# Altium PCB 裂缝(应变)计.PcbDoc
Units mm, origin at the board's own origin, x right, y up, seen from the top; angles counter-clockwise.
Board outline 152.4 x 101.6 mm, 2 copper layers (Top Layer, Bottom Layer); 77 components, 65 nets, 268 pads, 0 vias.
Unrouted connection lines stored in the file: 181.
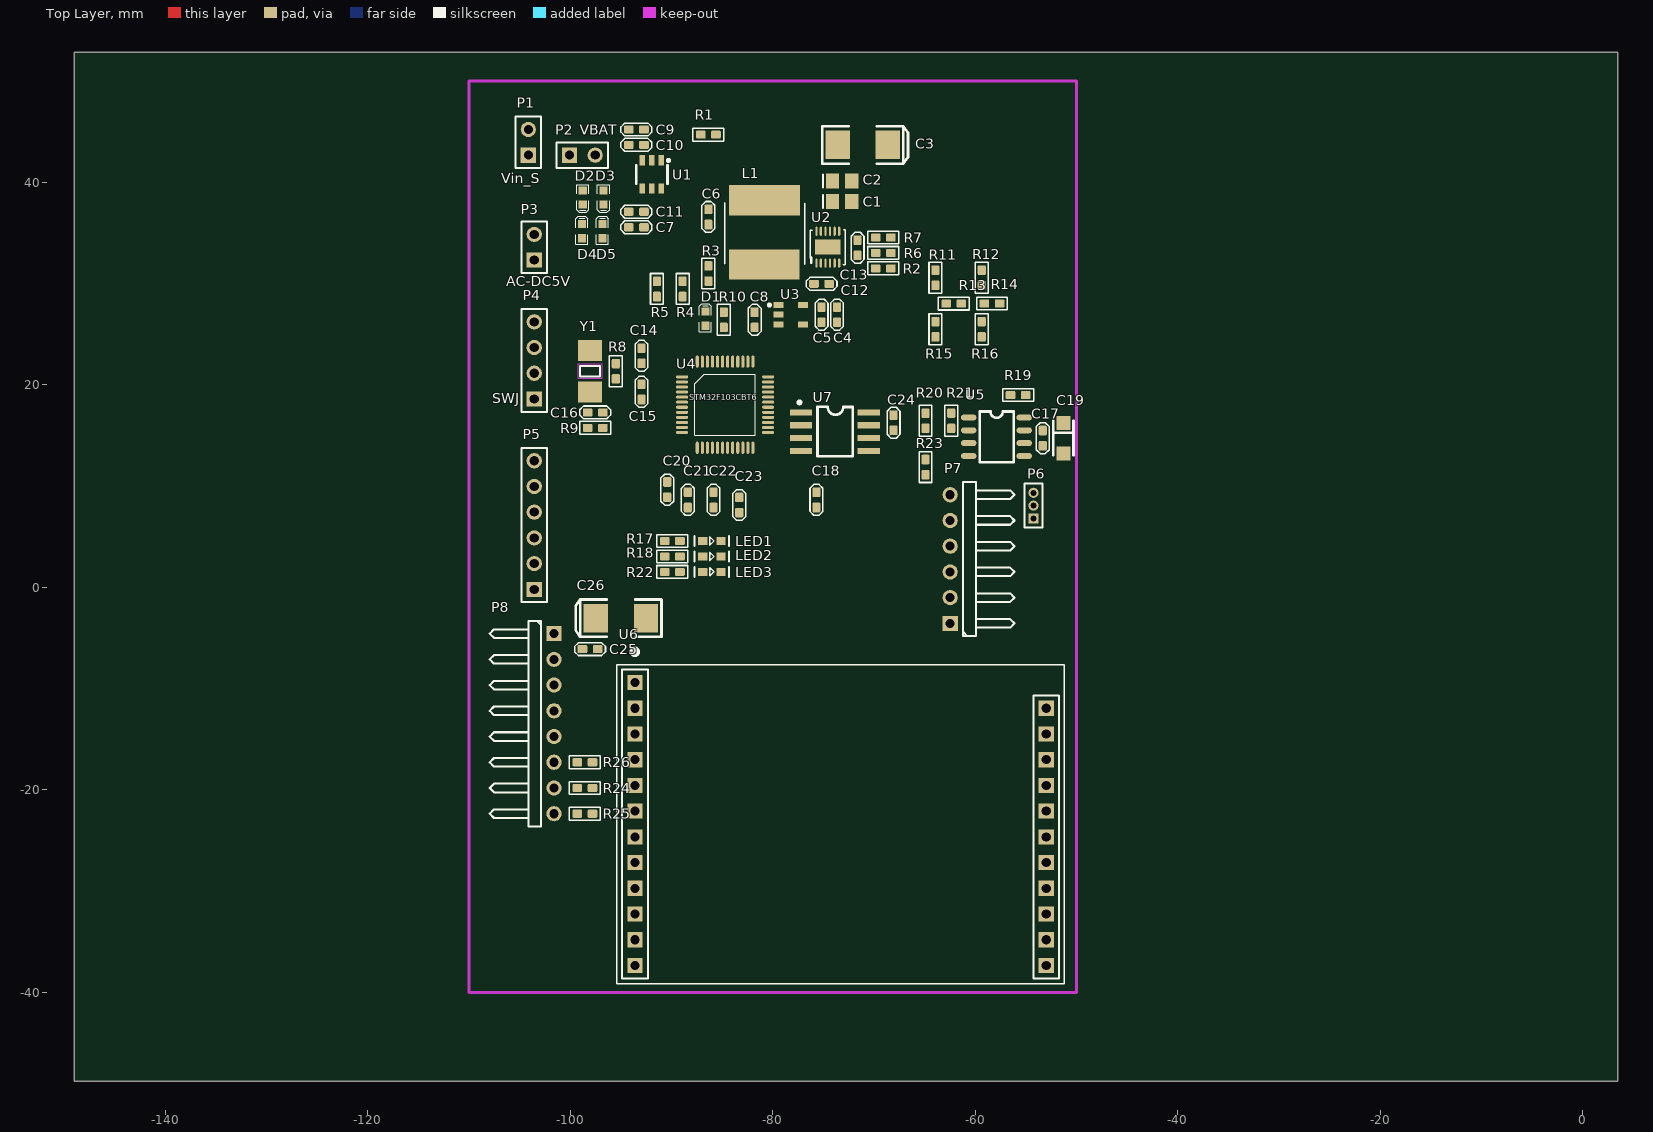
[diagram p0: Top Layer view]
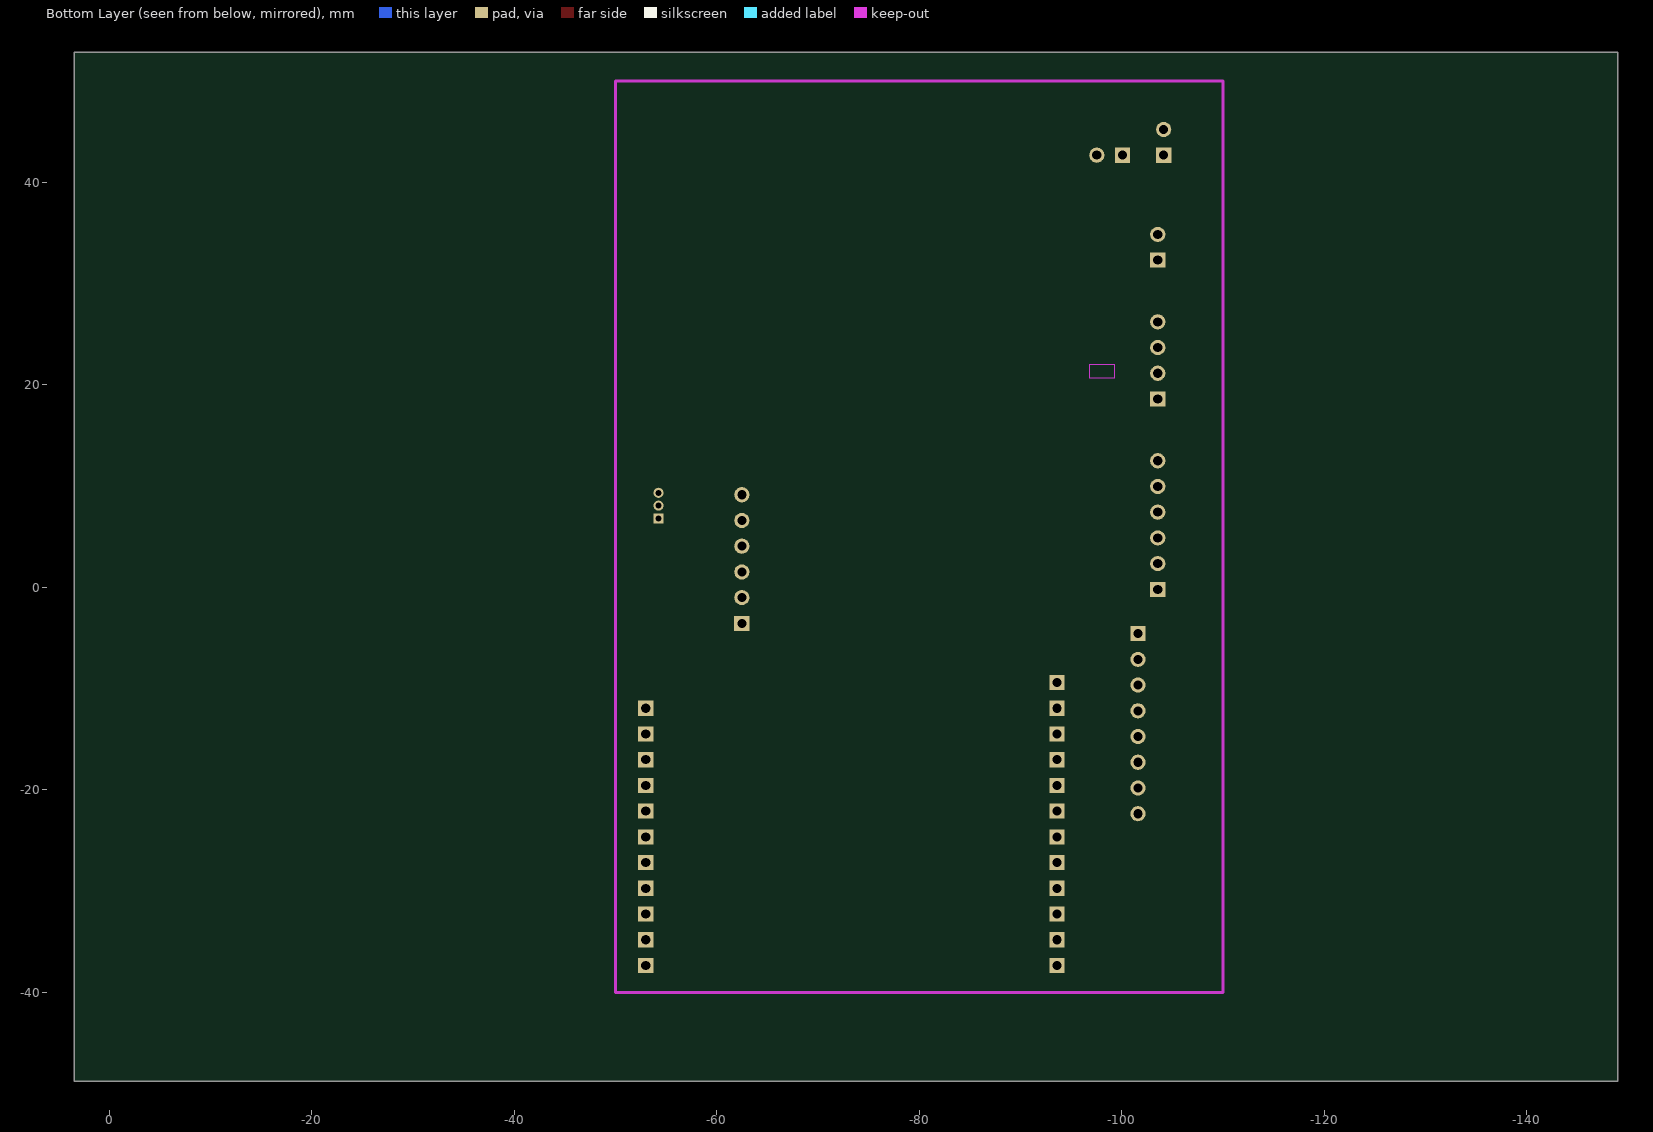
[diagram p1: Bottom Layer view, seen from below]

## Layer stack, top to bottom
Top Layer: signal copper 0.0356
Dielectric: dielectric 0.32, FR-4, Dk 4.8
Bottom Layer: signal copper 0.0356

## Board outline
-148.971,-48.768 3.429,-48.768 3.429,52.832 -148.971,52.832

## Design rules (kind name [scope] priority, off if disabled: settings)
Clearance [All] p1: gap=0.2
ComponentClearance [All] p1: gap=0.254 collisioncheckmode=3 verticalgap=0.1 showdistances=FALSE
MinimumSolderMaskSliver [All] p1: minsoldermaskwidth=0
PolygonConnect [All] p1: connectstyle=Relief reliefconductorwidth=0.254 reliefentries=4 polygonreliefangle="90 Angle"
RoutingVias [All] p1: holewidth=0.711 width=1.27 viastyle="Through Hole" minholewidth=0.711 minwidth=1.27 maxholewidth=0.711 maxwidth=1.27
SilkToSilkClearance [All] p1: silktosilkclearance=0
SilkscreenOverComponentPads [All] p1: minsilkscreentomaskgap=0
SolderMaskExpansion [All] p1: expansion=0.102
TestPointUsage [All] p1: valid=0 allowmultiple=FALSE
Testpoint [All] p1: side=15 testpointundercomponent=TRUE minsize=1.016 maxsize=2.54 preferedsize=1.524 minholesize=0 maxholesize=1.016 preferedholesize=0.813 testpointgrid=0.025 style=1023 order=0123456789
Width [All] p1: maxlimit=0.254 minlimit=0.254 preferedwidth=0.254
20 further rules are at their usual default settings.

## Components (designator, comment, footprint, x,y, rotation, side; value= is the part's Value field where it differs from the comment)
C1 "22uF" C0805 -73.152,38.1 r0 top
C2 "Cap" C0805 -73.152,40.132 r0 top
C3 "220uF/25V" C_6032 -71.12,43.688 r0 top
C4 "106" C0603 -73.66,26.924 r270 top
C5 "104" C0603 -75.184,26.924 r270 top
C6 "Cap" C0603 -86.36,36.576 r90 top
C7 "106" C0603 -93.472,35.56 r0 top
C8 "105" C0603 -81.788,26.416 r270 top
C9 "106" C0603 -93.472,45.212 r0 top
C10 "104" C0603 -93.472,43.688 r180 top
C11 "104" C0603 -93.472,37.084 r180 top
C12 "Cap" C0603 -75.184,29.972 r180 top
C13 "1uF" C0603 -71.628,33.528 r270 top
C14 "22PF" C0603 -92.964,22.86 r90 top
C15 "22PF" C0603 -92.964,19.304 r270 top
C16 "104" C0603 -97.536,17.272 r180 top
C17 "104" C0603 -53.34,14.732 r270 top
C18 "106" C0603 -75.692,8.636 r90 top
C19 "104" 3216 -51.308,14.732 r90 top
C20 "104" C0603 -90.424,9.652 r270 top
C21 "104" C0603 -88.392,8.636 r90 top
C22 "104" C0603 -85.852,8.636 r90 top
C23 "104" C0603 -83.312,8.128 r90 top
C24 "104" C0603 -68.072,16.256 r270 top
C25 "104" C0603 -98.044,-6.096 r180 top
C26 "220uF/25V" C_6032 -94.996,-3.048 r180 top
D1 "RB521S-30" DO-214AB(SMC) -86.36,27.432 r90 top
D2 "SS34" DO-214AB(SMC) -99.06,37.592 r270 top
D3 "SS34" DO-214AB(SMC) -97.028,37.592 r270 top
D4 "SS34" DO-214AB(SMC) -98.552,36.068 r90 top
D5 "SS34" DO-214AB(SMC) -96.52,36.068 r90 top
L1 "Inductor" L_8X8 -80.264,33.02 r90 top
LED1 "LED-RED" 0603_LED -86.868,4.572 r0 top
LED2 "LED-RED" 0603_LED -86.868,3.048 r0 top
LED3 "LED-BLUE" 0603_LED -86.868,1.524 r0 top
P1 "Vin_S" HDR1X2 -104.14,42.672 r90 top
P2 "VBAT" HDR1X2 -100.076,42.672 r0 top
P3 "AC-DC5V" HDR1X2 -103.552,32.314 r90 top
P4 "SWJ" HDR1X4 -103.552,18.598 r90 top
P5 "U_Test" HDR1X6 -103.552,-0.198 r90 top
P6 "" MHDR1X3 -54.252,6.796 r90 top
P7 "应变计接口" HDR1X6H -62.484,-3.556 r90 top
P8 "4GCat1接口" HDR1X8H -101.6,-4.572 r270 top
R1 "4.7k" R0603 -86.36,44.704 r0 top
R2 "51K" R0603 -69.088,31.496 r0 top
R3 "4.7k" R0603 -86.36,30.988 r90 top
R4 "330/0603" R0603 -88.9,29.464 r90 top
R5 "330/0603" R0603 -91.44,29.464 r90 top
R6 "750K%1" R0603 -69.088,33.02 r0 top
R7 "100K%1" R0603 -69.088,34.544 r0 top
R8 "1M" R0603 -95.504,21.336 r270 top
R9 "10k/1%/0.1w" R0603 -97.536,15.748 r0 top
R10 "10k" R0603 -84.836,26.416 r90 top
R11 "100K%1" R0603 -63.941,30.564 r90 top
R12 "100K%1" R0603 -59.369,30.564 r270 top
R13 "1K" R0603 -62.125,28.02 r180 top
R14 "1K" R0603 -58.353,28.024 r0 top
R15 "100K%1" R0603 -63.941,25.484 r90 top
R16 "100K%1" R0603 -59.369,25.484 r90 top
R17 "4.7k" R0603 -89.916,4.572 r0 top
R18 "330" R0603 -89.916,3.048 r180 top
R19 "22K" R0603 -55.776,18.988 r0 top
R20 "9K%0.1" R0603 -64.92,16.448 r270 top
R21 "9K%0.1" R0603 -62.38,16.448 r90 top
R22 "330" R0603 -89.916,1.524 r0 top
R23 "2K%0.1" R0603 -64.92,11.876 r270 top
R24 "4.7k" R0603 -98.552,-19.812 r0 top
R25 "4.7k" R0603 -98.552,-22.352 r180 top
R26 "4.7k" R0603 -98.552,-17.272 r180 top
U1 "TP4057ST26P" SOT23-6L -91.948,40.64 r180 top
U2 "ETA1090" DFN3x3_12 -75.692,32.004 r90 top
U3 "LR6232B33MR" SOT23-5_LR6232B33M -78.232,26.924 r270 top
U4 "STM32F103CBT6" STM32F103CBT6 -88.9,20.828 r0 top
U5 "AD623ARZ-R7" SOIC-8_L5.0-W4.0-P1.27-LS6.0-BL -57.912,17.272 r270 top
U6 "WH-LTE-7S1" WH-LTE-7S1 -93.472,-9.144 r0 top
U7 "W25Q8ODVSSIG" "SOIC-8 208-mil" -77.216,17.272 r0 top
Y1 "8M" XT_SMD_5032_2P -98.044,21.336 r270 top

## Footprints (in the part's own frame and the unit in brackets; to place one, negate y for a bottom-side part, rotate by r counter-clockwise, add the part's x,y. Pads: shape width x height; smd on the part's side, far side on the other; paste and mask are expansions set on the pad)
0603_LED [mm]
  rect 0.9x0.8 smd: 1(-0.05,0) 2(1.75,0)
  silkscreen extent -0.85,-0.5 2.55,0.5
3216 [mm]
  rect 1.4x1.4 smd: 1(1.5,0) 2(-1.5,0)
  silkscreen extent -1.7,-1 1.7,1
C0603 [mm]
  rrect30% 0.95x0.8 smd: 1(-0.75,0) 2(0.75,0)
  silkscreen extent -1.52,-0.64 1.52,0.64, body extent -0.81,-0.41 0.81,0.41, height 0.8
C0805 [mm] "Chip Capacitor; Body 2.0 x 1.2 mm (LxW typ)"
  rect 1.3x1.5 smd: 1(-0.95,0) 2(0.95,0)
  silkscreen extent -1.9,-0.65 -1.9,0.65
C_6032 [mm]
  rect 2.4x2.8 smd: 1(2.48,0) 2(-2.48,0)
  silkscreen extent -4.01,-1.85 4.47,1.85, body extent -3.05,-1.68 3.05,1.67, height 2.7
DFN3x3_12 [mm]
  rect 1.5x2.5 smd: 0(1.591,-1.105)
  oval 0.9x0.23 smd: 1(0.006,-0.004) 2(0.006,-0.444) 3(0.006,-0.894) 4(0.006,-1.344) 5(0.006,-1.794) 6(0.006,-2.244) 7(3.156,-2.244) 8(3.156,-1.794) 9(3.156,-1.344) 10(3.156,-0.894) 11(3.156,-0.444) 12(3.156,-0.004)
  silkscreen extent -0.14,-2.84 3.29,0.59
DO-214AB(SMC) [mm]
  rect 0.8x0.8 smd: 1(-1.6,0.3) 2(-0.2,0.3)
  silkscreen extent -2.18,-0.28 0.56,0.91, body extent -1.74,-0.13 -0.04,0.77, height 0.7
HDR1X2 [mm]
  rect 1.5x1.5 hole 0.9: 1(0,0)
  round 1.5 hole 0.9: 2(2.54,0)
  silkscreen extent -1.27,-1.27 3.81,1.27
HDR1X4 [mm] "Connector; Header; 4 Position"
  rect 1.5x1.5 hole 0.9: 1(0,0)
  round 1.5 hole 0.9: 2(2.54,0) 3(5.08,0) 4(7.62,0)
  silkscreen extent -1.27,-1.27 8.89,1.27
HDR1X6 [mm] "Connector; Header; 6 Position"
  rect 1.5x1.5 hole 0.9: 1(0,0)
  round 1.5 hole 0.9: 2(2.54,0) 3(5.08,0) 4(7.62,0) 5(10.16,0) 6(12.7,0)
  silkscreen extent -1.27,-1.27 13.97,1.27
HDR1X6H [mm] "Connector; Header; 6 Position; Right Angle"
  rect 1.5x1.5 hole 0.9: 1(0,0)
  round 1.5 hole 0.9: 2(2.54,0) 3(5.08,0) 4(7.62,0) 5(10.16,0) 6(12.7,0)
  silkscreen extent -1.27,-6.35 13.97,-1.27
HDR1X8H [mm] "Connector; Header; 8 Position; Right Angle"
  rect 1.5x1.5 hole 0.9: 1(0,0)
  round 1.5 hole 0.9: 2(2.54,0) 3(5.08,0) 4(7.62,0) 5(10.16,0) 6(12.7,0) 7(15.24,0) 8(17.78,0)
  silkscreen extent -1.27,-6.35 19.05,-1.27
L_8X8 [mm]
  rect 3x7 smd: 1(5.212,0.565) 2(-1.14,0.579)
  silkscreen extent -1.12,-3.4 4.97,4.5
MHDR1X3 [mm] "Connector; Header; 3 Position"
  rect 1x1 hole 0.6: 1(0,0)
  round 1 hole 0.6: 2(1.27,0) 3(2.54,0)
  silkscreen extent -0.9,-0.9 3.44,0.9
R0603 [mm]
  rrect30% 0.95x0.8 smd: 1(0.75,0) 2(-0.75,0)
  silkscreen extent -1.52,-0.64 1.52,0.64, body extent -0.81,-0.41 0.81,0.41, height 0.4
"SOIC-8 208-mil" [mm]
  rect 2.2x0.6 smd: 1(0,0) 2(0,-1.27) 3(0,-2.54) 4(0,-3.81) 5(6.7,-3.81) 6(6.7,-2.54) 7(6.7,-1.27) 8(6.7,0)
  silkscreen extent -0.3,-4.32 5.11,1.14, body extent 0.18,-4.42 6.38,0.58, height 1.75
SOIC-8_L5.0-W4.0-P1.27-LS6.0-BL [mm]
  oval 0.6x1.52 smd: 1(0.495,-2.74) 2(1.765,-2.74) 3(3.035,-2.74) 4(4.305,-2.74) 5(4.305,2.74) 6(3.035,2.74) 7(1.765,2.74) 8(0.495,2.74)
  silkscreen extent -0.09,-1.67 4.9,1.7
SOT23-5_LR6232B33M [mm]
  rect 0.6x1 smd: 1(-0.95,-1.2) 2(0,-1.2) 3(0.95,-1.2) 4(0.95,1.2) 5(-0.95,1.2)
  silkscreen extent -1.05,-2.2 -0.85,-2, body extent -1.5,-1.45 1.5,1.45, height 1
SOT23-6L [mm]
  rect 0.55x1 smd: 1(-0.95,-1.527) 2(0,-1.527) 3(0.95,-1.527) 4(0.95,1.273) 5(0,1.273) 6(-0.95,1.273)
  silkscreen extent -1.78,-1.65 1.55,0.77
STM32F103CBT6 [mm]
  oval 1.2x0.3 smd: 1(-0.059,-0.044) 2(-0.059,-0.544) 3(-0.059,-1.044) 4(-0.059,-1.544) 5(-0.059,-2.044) 6(-0.059,-2.544) 7(-0.059,-3.044) 8(-0.059,-3.544) 9(-0.059,-4.044) 10(-0.059,-4.544) 11(-0.059,-5.044) 12(-0.059,-5.544) 25(8.441,-5.544) 26(8.441,-5.044) 27(8.441,-4.544) 28(8.441,-4.044) 29(8.441,-3.544) 30(8.441,-3.044) 31(8.441,-2.544) 32(8.441,-2.044) 33(8.441,-1.544) 34(8.441,-1.044) 35(8.441,-0.544) 36(8.441,-0.044)
  oval 0.3x1.2 smd: 13(1.441,-7.044) 14(1.941,-7.044) 15(2.441,-7.044) 16(2.941,-7.044) 17(3.441,-7.044) 18(3.941,-7.044) 19(4.441,-7.044) 20(4.941,-7.044) 21(5.441,-7.044) 22(5.941,-7.044) 23(6.441,-7.044) 24(6.941,-7.044) 37(6.941,1.456) 38(6.441,1.456) 39(5.941,1.456) 40(5.441,1.456) 41(4.941,1.456) 42(4.441,1.456) 43(3.941,1.456) 44(3.441,1.456) 45(2.941,1.456) 46(2.441,1.456) 47(1.941,1.456) 48(1.441,1.456)
  silkscreen extent 1.19,-5.79 7.19,0.21
WH-LTE-7S1 [mm]
  rect 1.5x1.5 hole 0.9: 1(-0.127,-0.254) 2(-0.127,-2.794) 3(-0.127,-5.334) 4(-0.127,-7.874) 5(-0.127,-10.414) 6(-0.127,-12.954) 7(-0.127,-15.494) 8(-0.127,-18.034) 9(-0.127,-20.574) 10(-0.127,-23.114) 11(-0.127,-25.654) 12(-0.127,-28.194) 13(40.473,-28.194) 14(40.473,-25.654) 15(40.473,-23.114) 16(40.473,-20.574) 17(40.473,-18.034) 18(40.473,-15.494) 19(40.473,-12.954) 20(40.473,-10.414) 21(40.473,-7.874) 22(40.473,-5.334) 23(40.473,-2.794)
  silkscreen extent -1.93,-29.99 42.27,2.9
XT_SMD_5032_2P [mm]
  rect 2.1x2.4 smd: 1(-2.05,0) 2(2.05,0)
  Multi-Layer keep-out region: -0.7,-1.2 0.7,-1.2 0.7,1.2 -0.7,1.2
  silkscreen extent -0.5,-1 0.5,1

## Part data
C1 C13 C14 C15 C16: library part Cap, "Capacitor"
C2 C6 C12: "Capacitor"
C3 C26: library part "Cap Pol1", "Polarized Capacitor (Radial)"
C4 C5 C8 C24: library part CAP_1, "贴片电容"
C7 C9 C10 C11 C17 C18 C20 C21 C22 C23 C25: library part CAP, "Capacitor"
C19: library part CAP_1, "钽电容"
D1 D2 D3 D4 D5: library part "D Schottky", "肖特基二极管"
LED1 LED2 LED3: "发光二极管"
P1 P2 P3: library part "Header 2H", "Header, 2-Pin, Right Angle"
P4: library part header4, "2.54接口，4pin"
P5: library part "Header 6", "Header, 6-Pin"
P6: library part MHDR1X3, "航空插排（座）, 3-Pin"
P7: library part "Header 6H", "Header, 6-Pin, Right Angle"
P8: library part "Header 8H", "4G接插口 8-Pin, Right Angle"
R1 R3 R11 R12 R13 R14 R15 R16 R17 R18 R19 R20 R21 R22 R23: library part RES1, "贴片电阻"
R2 R4 R5 R6 R7 R24 R25 R26: library part Res1, "Resistor"
R8 R10: library part Res2, "Resistor"
R9: library part res1, "Resistor"
U1: library part Component_1, "充电芯片"
U2: library part "Header 6X2H", "5V稳压电路"
U3: library part XC6221-xxxMR, "3.3V稳压芯片"
U4: library part Component_1, "MCU主控"
U6: "4G-Cat1模块"
U7: library part W25-Series, "华邦 NOR Flash存储器/SOIC-8 208-mil"
Y1: library part XTAL, "Crystal Oscillator"

## Nets (pads, with @x,y where several pads share a name; then routed paths per layer and width w, separated by ;. In a path a pad name is that pad's centre, name@x,y a point inside that pad or via, vN(x,y) a via of type N, cw(c..) or ccw(c..) an arc to the next point about the centre after c; other vN are vias at no path point)
4G_PWR_KEY: P8.6 R26.1 U6.10
4G_RELOAD: P8.8 R25.2 U6.18
4G_RESET: P8.7 R24.2 U6.19
CHRG: R5.1 U1.1
EN: D1.2 R3.2 U2.3
GND: C1.2 C2.2 C3.1 C4.2 C5.2 C6.1 C7.2 C8.2 C9.2 C10.1 C11.1 C12.1 C13.2 C14.2 C15.2 C16.2 C17.2 C18.2 C19.2 C20.2 C21.2 C22.2 C23.2 C24.2 C25.1 C26.2 LED1.2 LED2.2 LED3.2 P1.1 P2.1 P3.1 P4.1 P5.1 P6.1 P7.1 P8.3 R1.1 R2.1 R7.1 R10.1 R15.2 R16.1 R23.1 U1.2 U2.5 U2.6 U2.11 U2.12 U3.2 U4.8 U4.23 U4.35 U4.47 U5.4 U5.5 U6.11 U6.12 U7.4
LINKA: P5.5 U6.1
LINKB: P5.4 U6.2
MCU_EN_5V: D1.1 U4.45
MCU_KPM_ADC: U5.6
MCU_LED1: R18.1 U4.18
MCU_LED2: R22.1 U4.19
MCU_U1RX: P5.3 U4.31
MCU_U1TX: P5.2 U4.30
MCU_U2RX: P8.4 U4.13
MCU_U2TX: P8.5 U4.12
MCU_U3RX: P7.3 U4.22
MCU_U3TX: P7.4 U4.21
MCU_VBT_ADC: R14.1 U4.16
MCU_VIN5V_ADC: R13.2 U4.15
MCU_VOUTKPM_ADC: U4.14
NET: U6.15
NetL1_1: L1.1 U2.1 U2.2
NetLED1_1: LED1.1 R17.2
NetLED2_1: LED2.1 R18.2
NetLED3_1: LED3.1 R22.2
NetP6_2: P6.2 R21.2 U5.3
NetR1_2: R1.2 U1.6
NetR2_2: R2.2 U2.8
NetR6_1: R6.1 R7.2 U2.7
NetR10_2: R10.2 U4.44
NetR11_2: R11.2 R13.1 R15.1
NetR12_1: R12.1 R14.2 R16.2
NetR19_1: R19.1 U5.8
NetR19_2: R19.2 U5.1
NetR20_1: R20.1 R23.2 U5.2
NRST: C16.1 R9.1 U4.7
PA7: U4.17
PA11: U4.32
PA12: U4.33
PA15: U4.38
PB3: U4.39
PB4: U4.40
PB5: U4.41
PB6: R4.2 U4.42
PB7: R5.2 U4.43
SPI2_CS: U4.25 U7.1
SPI2_MISO: U4.27 U7.2
SPI2_MOSI: U4.28 U7.5
SPI2_SCK: U4.26 U7.6
STDBY: R4.1 U1.5
SWCLK: P4.3 U4.37
SWDIO: P4.2 U4.34
U2RX: U6.6
U2TX: U6.7
V3.3V: C4.1 C5.1 C17.1 C18.1 C24.1 P4.4 P5.6 P7.5 P8.2 R9.2 R20.2 R21.1 R24.1 R25.1 R26.2 U3.5 U4.1 U4.24 U4.36 U5.7 U7.7 U7.8
V3_3V: C19.1 C20.1 C21.1 C22.1 C23.1 U4.9 U4.48 U7.3
VBAT: C9.1 C10.2 D2.1 D3.1 P2.2 R12.2 U1.3
VIN_5V: C7.1 C11.2 D4.1 D5.1 P3.2 R11.1 R17.1 U1.4
VIN_(5/3.7V): C6.2 C8.1 C12.2 D2.2 D3.2 D4.2 D5.2 L1.2 R3.1 U2.4 U3.1 U3.3
VIN_SOLAR: P1.2
VOUT_5V: C1.1 C2.1 C3.2 C13.1 C25.2 C26.1 P7.6 P8.1 R6.2 U2.9 U2.10 U6.13 U6.14
WORK: U6.9
XTAL1: C14.1 R8.2 U4.5 Y1.1
XTAL2: C15.1 R8.1 U4.6 Y1.2
pads on no net: P6.3 P7.2 U2.0 U3.4 U4.2 U4.3 U4.4 U4.10 U4.11 U4.20 U4.29 U4.46 U6.3 U6.4 U6.5 U6.8 U6.16 U6.17 U6.20 U6.21 U6.22 U6.23

## Keep-outs
Keep-Out Layer:
  lines w0.3: -110,-40 -50,-40 -50,50 -110,50 -110,-40